# Altium PCB 核心板.pcbdoc (part 2 of 2)
Units mil, origin at the board's own origin, x right, y up, seen from the top; angles counter-clockwise.
Board outline 5980 x 3735 mil, 2 copper layers (Top Layer, Bottom Layer); 54 components, 185 nets, 550 pads, 371 vias.
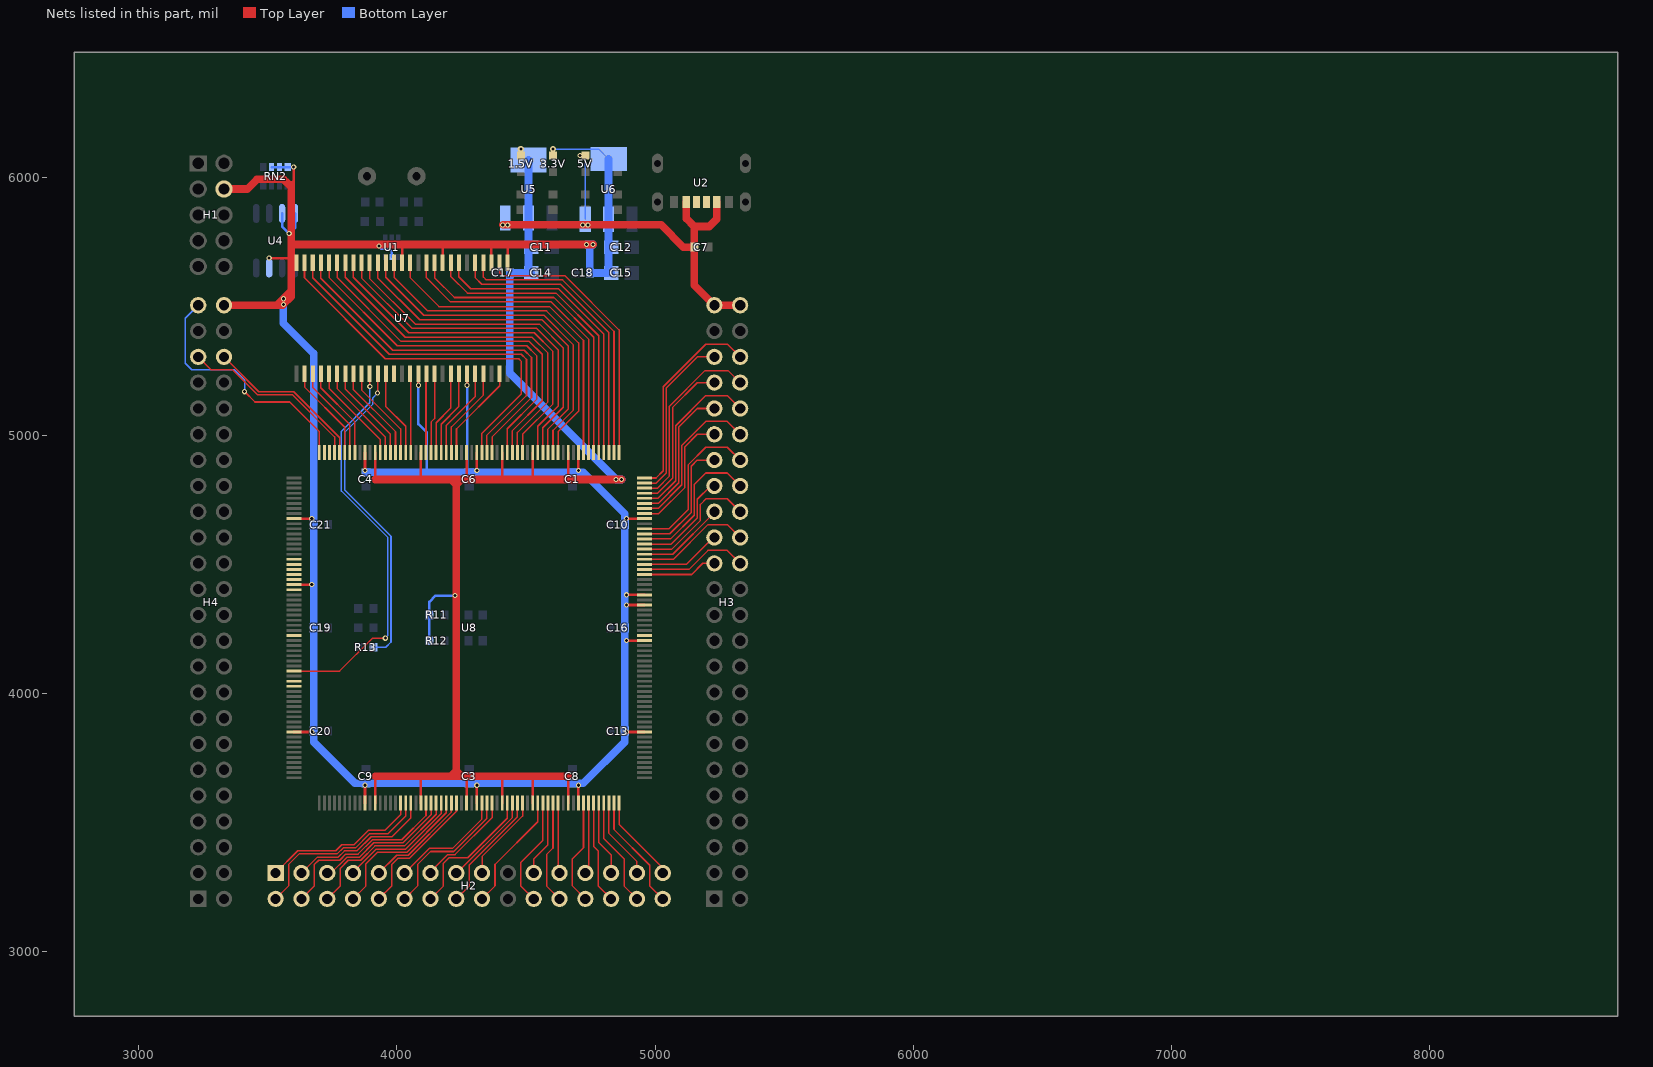
[diagram p2: the nets of this part, all layers, seen from the top]

## Via types
v1: diameter 20, hole 12, Top Layer to Bottom Layer, 369 vias
v2: diameter 24, hole 12, Top Layer to Bottom Layer, 2 vias

## Nets (pads, with @x,y where several pads share a name; then routed paths per layer and width w, separated by ;. In a path a pad name is that pad's centre, name@x,y a point inside that pad or via, vN(x,y) a via of type N, cw(c..) or ccw(c..) an arc to the next point about the centre after c; other vN are vias at no path point) (continued)
IO/161: H3.27 U8.161 | length 288.8
  Top Layer w6: U8.161@4959.14,4461.69 5142.05,4461.69 5185.36,4505 H3.27@5230,4505
IO/162: H3.28 U8.162 | length 422.1
  Top Layer w6: U8.162@4959.14,4481.38 5131.38,4481.38 5205,4555 5280,4555 H3.28@5330,4505
IO/163: H3.29 U8.163 | length 313.9
  Top Layer w6: U8.163@4959.14,4501.06 5121.92,4501.06 5225.86,4605 H3.29@5230,4605
IO/164: H3.30 U8.164 | length 447.2
  Top Layer w6: U8.164@4959.14,4520.75 5071.51,4520.75 5205.76,4655 5280,4655 H3.30@5330,4605
IO/165: H3.31 U8.165 | length 340.9
  Top Layer w6: U8.165@4959.14,4540.43 5068.57,4540.43 5230,4701.86 H3.31@5230,4705
IO/166: H3.32 U8.166 | length 509
  Top Layer w6: U8.166@4959.14,4560.12 5065.63,4560.12 5176,4670.49 5176,4733.17 5197.83,4755 5280,4755 H3.32@5330,4705
IO/167: H3.33 U8.167 | length 406.3
  Top Layer w6: U8.167@4959.14,4579.8 5062.68,4579.8 5164,4681.12 5164,4753.14 5215.86,4805 H3.33@5230,4805
IO/168: H3.34 U8.168 | length 566.7
  Top Layer w6: U8.168@4959.14,4599.49 5059.74,4599.49 5152,4691.75 5152,4810.03 5196.97,4855 5280,4855 H3.34@5330,4805
IO/169: H3.35 U8.169 | length 493.9
  Top Layer w6: U8.169@4959.14,4619.17 5056.8,4619.17 5140,4702.37 5140,4881.06 5163.94,4905 H3.35@5230,4905
IO/170: H3.36 U8.170 | length 623.9
  Top Layer w6: U8.170@4959.14,4638.86 5053.86,4638.86 5128,4713 5128,4886.03 5196.97,4955 5280,4955 H3.36@5330,4905
IO/173: H3.37 U8.173 | length 490.6
  Top Layer w6: U8.173@4959.14,4697.91 5014.88,4697.91 5116,4799.03 5116,4957.06 5163.94,5005 H3.37@5230,5005
IO/174: H3.38 U8.174 | length 621
  Top Layer w6: U8.174@4959.14,4717.6 5012.6,4717.6 5104,4809 5104,4962.03 5196.97,5055 5280,5055 H3.38@5330,5005
IO/175: H3.39 U8.175 | length 549.7
  Top Layer w6: U8.175@4959.14,4737.28 5012.28,4737.28 5092,4817 5092,5033.06 5163.94,5105 H3.39@5230,5105
IO/176: H3.40 U8.176 | length 681.2
  Top Layer w6: U8.176@4959.14,4756.97 5011.97,4756.97 5080,4825 5080,5038.03 5196.97,5155 5280,5155 H3.40@5330,5105
IO/177: H3.41 U8.177 | length 608.9
  Top Layer w6: U8.177@4959.14,4776.65 5009.68,4776.65 5068,4834.97 5068,5109.06 5163.94,5205 H3.41@5230,5205
IO/178: H3.42 U8.178 | length 737.9
  Top Layer w6: U8.178@4959.14,4796.34 5009.37,4796.34 5056,4842.97 5056,5114.03 5193.97,5252 5283,5252 H3.42@5330,5205
IO/179: H3.43 U8.179 | length 666.2
  Top Layer w6: U8.179@4959.14,4816.02 5005.05,4816.02 5044,4854.97 5044,5184.03 5164.97,5305 H3.43@5230,5305
IO/180: H3.44 U8.180 | length 796.2
  Top Layer w6: U8.180@4959.14,4835.71 5003.74,4835.71 5032,4863.97 5032,5189 5197,5354 5281,5354 H3.44@5330,5305
MA0: U7.23 U8.203 | length 1409.9
  Top Layer w6: U7.23@3736.95,5670 3736.95,5612.08 4001.03,5348 4502.91,5348 4541,5309.91 4541,5140.09 4427.64,5026.72 U8.203@4427.64,4934.13
MA1: U7.24 U8.206 | length 1435.6
  Top Layer w6: U7.24@3704.97,5670 3704.97,5610.03 3984,5331 4492.94,5331 4521.5,5302.44 4521.5,5147.56 4368.57,4994.63 U8.206@4368.57,4934.13
MA2: U7.25 U8.207 | length 1442.2
  Top Layer w6: U7.25@3673.95,5670 3673.95,5611.05 3970,5315 4481.97,5315 4502,5294.97 4502,5155.03 4348.9,5001.92 U8.207@4348.9,4934.13
MA3: U7.26 U8.208 | length 1450.4
  Top Layer w6: U7.26@3641.95,5670 3641.95,5611.08 3955.03,5298 4472,5298 4482.5,5287.5 4482.5,5162.5 4329.2,5009.2 U8.208@4329.2,4934.13
MA4: U7.29 U8.235 | length 370.4
  Top Layer w6: U7.29@3642,5240 3642,5188 3797.72,5032.28 U8.235@3797.72,4934.13
MA5: U7.30 U8.234 | length 365.3
  Top Layer w6: U7.30@3674,5240 3674,5186 3817.41,5042.6 U8.234@3817.41,4934.13
MA6: U7.31 U8.233 | length 360.6
  Top Layer w6: U7.31@3704.97,5240 3704.97,5185.03 3837.09,5052.91 U8.233@3837.09,4934.13
MA7: U7.32 U8.228 | length 388.1
  Top Layer w6: U7.32@3737,5240 3737,5183 3935.51,4984.48 U8.228@3935.51,4934.13
MA8: U7.33 U8.227 | length 383.4
  Top Layer w6: U7.33@3768,5240 3768,5182 3955.2,4994.81 U8.227@3955.2,4934.13
MA9: U7.34 U8.226 | length 378.3
  Top Layer w6: U7.34@3799.97,5240 3799.97,5180.03 3974.89,5005.11 U8.226@3974.89,4934.13
MA10: U7.22 U8.202 | length 1404.2
  Top Layer w6: U7.22@3768,5670 3768,5613 4016,5365 4512.88,5365 4563,5314.88 4563,5135.12 4447.31,5019.43 U8.202@4447.31,4934.13
MA11: U7.35 U8.225 | length 373.6
  Top Layer w6: U7.35@3831.05,5240 3831.05,5178.95 3994.57,5015.44 U8.225@3994.57,4934.13
MA12: U7.36 U8.224 | length 368.5
  Top Layer w6: U7.36@3863,5240 3863,5177 4014.26,5025.74 U8.224@4014.26,4934.13
MBA0: U7.20 U8.200 | length 1389.7
  Top Layer w6: U7.20@3831.05,5670 3831.05,5613.03 4046.08,5398 4532,5398 4604.5,5325.5 4604.5,5122.68 4486.69,5004.86 U8.200@4486.69,4934.13
MBA1: U7.21 U8.201 | length 1398
  Top Layer w6: U7.21@3799.97,5670 3799.97,5613.06 4032.03,5381 4523.85,5381 4585,5319.85 4585,5130.15 4467.01,5012.15 U8.201@4467.01,4934.13
MCAS: U7.17 U8.195 | length 1352.1
  Top Layer w6: U7.17@3926.05,5670 3926.05,5611 4088.05,5449 4561.91,5449 4664.37,5346.54 4664.37,5104.37 4585.11,5025.11 U8.195@4585.11,4934.13
MCKE: U7.37 U8.39 | length 1556.6
  Top Layer w6: U8.39@3600.86,4087.68 3777.68,4087.68 3905,4215 v1(3955,4215) ; U7.37@3894,5240 3895,5239 v1(3895,5190)
  Bottom Layer w6: v1(3895,5190) 3895,5126.97 3785,5016.97 3785,4785 3965,4605 3965,4225 v1(3955,4215)
MCLK: R13.2 U7.38 | length 1243.6
  Top Layer w6: v1(3925,5165) 3926.05,5166.05 U7.38@3926.05,5240
  Bottom Layer w6: R13.2@3909.66,4180 3956.87,4180 3977,4200.13 3977,4609.97 3797,4789.97 3797,5012 3907,5122 3907,5147 v1(3925,5165)
MCS: U7.19 U8.197 | length 1367.2
  Top Layer w6: U7.19@3863,5670 3863,5611 4059,5415 4541.97,5415 4625,5331.97 4625,5115 4545.74,5035.74 U8.197@4545.74,4934.13
MD0: U7.2 U8.181 | length 1068.7
  Top Layer w6: U7.2@4398,5670 4398,5631 4409,5620 4650,5620 4860.7,5409.3 U8.181@4860.7,4934.13
MD1: U7.4 U8.182 | length 1118.6
  Top Layer w6: U7.4@4334.97,5670 4334.97,5614 4345.97,5603 4641.47,5603 4841.02,5403.46 U8.182@4841.02,4934.13
MD2: U7.5 U8.183 | length 1129.2
  Top Layer w6: U7.5@4303,5670 4303,5612 4329,5586 4634,5586 4821.34,5398.66 U8.183@4821.34,4934.13
MD3: U7.7 U8.184 | length 1167.7
  Top Layer w6: U7.7@4239.97,5670 4239.97,5615 4285.97,5569 4626,5569 4801.65,5393.35 U8.184@4801.65,4934.13
MD4: U7.8 U8.185 | length 1174.6
  Top Layer w6: U7.8@4209,5670 4209,5616 4273,5552 4616.85,5552 4781.97,5386.89 U8.185@4781.97,4934.13
MD5: U7.10 U8.186 | length 1216.9
  Top Layer w6: U7.10@4146.05,5670 4146.05,5611.92 4222.97,5535 4608.32,5535 4762.27,5381.05 U8.186@4762.27,4934.13
MD6: U7.11 U8.187 | length 1224.9
  Top Layer w6: U7.11@4114,5670 4114,5612 4208,5518 4598.35,5518 4742.6,5373.76 U8.187@4742.6,4934.13
MD7: U7.13 U8.188 | length 1265.1
  Top Layer w6: U7.13@4051.05,5670 4051.05,5612 4163.05,5500 4591.35,5500 4722.9,5368.45 U8.188@4722.9,4934.13
MD8: U7.42 U8.222 | length 306.9
  Top Layer w6: U7.42@4051.05,5240 4053.62,5237.43 U8.222@4053.62,4934.13
MD9: U7.44 U8.219 | length 306.4
  Top Layer w6: U8.219@4112.68,4934.13 4112.68,5238.68 U7.44@4114,5240
MD10: U7.45 U8.218 | length 311.5
  Top Layer w6: U8.218@4132.36,4934.13 4132.36,5052.36 4146.05,5066.05 U7.45@4146.05,5240
MD11: U7.47 U8.217 | length 329.5
  Top Layer w6: U8.217@4152.05,4934.13 4152.05,5049.41 4209,5106.36 U7.47@4209,5240
MD12: U7.48 U8.216 | length 334.1
  Top Layer w6: U8.216@4171.73,4934.13 4171.73,5044.1 4239.97,5112.34 U7.48@4239.97,5240
MD13: U7.50 U8.215 | length 352.1
  Top Layer w6: U8.215@4191.41,4934.13 4191.41,5038.78 4303,5150.36 U7.50@4303,5240
MD14: U7.51 U8.214 | length 357.2
  Top Layer w6: U8.214@4211.1,4934.13 4211.1,5033.47 4334.97,5157.34 U7.51@4334.97,5240
MD15: U7.53 U8.213 | length 375.1
  Top Layer w6: U8.213@4230.78,4934.13 4230.78,5025.78 4398,5193 U7.53@4398,5240
MLDQ: U7.15 U8.193 | length 1334.5
  Top Layer w6: U7.15@3989,5670 3989,5613 4119,5483 4579.5,5483 4703.74,5358.76 4703.74,5094.37 4624.48,5015.11 U8.193@4624.48,4934.13
MRAS: U7.18 U8.196 | length 1361.4
  Top Layer w6: U7.18@3894,5670 3894,5609 4071,5432 4551.94,5432 4644.68,5339.26 4644.68,5110 4565.43,5030.74 U8.196@4565.43,4934.13
MUDQ: U7.39 U8.223 | length 337.7
  Top Layer w6: U7.39@3957,5240 3957,5113 4033.93,5036.06 U8.223@4033.93,4934.13
MWE: U7.16 U8.194 | length 1342.5
  Top Layer w6: U7.16@3957,5670 3957,5613 4104,5466 4569.38,5466 4684.05,5351.33 4684.05,5099.37 4604.8,5020.11 U8.194@4604.8,4934.13
PWRLED: H4.47 U8.240 | length 982.4
  Top Layer w6: v1(3410,5170) 3450,5130 3585,5130 3699.3,5015.7 U8.240@3699.3,4934.13
  Bottom Layer w6: H4.47@3230,5505 3180,5455 3180,5280 3205,5255 3370,5255 3410,5215 v1(3410,5170)
SL0: H2.22 U8.105 | length 427
  Top Layer w6: H2.22@4530,3205 4480,3255 4480,3346.06 4565.43,3431.48 U8.105@4565.43,3575.87
SL1: H2.21 U8.106 | length 293.7
  Top Layer w6: H2.21@4530,3305 4530,3359.09 4585.11,3414.2 U8.106@4585.11,3575.87
SL2: H2.24 U8.107 | length 401.9
  Top Layer w6: U8.107@4604.8,3575.87 4604.8,3401.91 4580,3377.12 4580,3255 H2.24@4630,3205
SL3: H2.23 U8.108 | length 273.2
  Top Layer w6: U8.108@4624.48,3575.87 4624.48,3310.51 H2.23@4630,3305
SL4: H2.26 U8.113 | length 409.4
  Top Layer w6: U8.113@4722.9,3575.87 4722.9,3402.91 4680,3360 4680,3255 H2.26@4730,3205
SL5: H2.25 U8.114 | length 276.1
  Top Layer w6: H2.25@4730,3305 4742.6,3317.59 U8.114@4742.6,3575.87
SR0: H2.28 U8.115 | length 398.9
  Top Layer w6: U8.115@4762.27,3575.87 4762.27,3407.72 4780,3390 4780,3255 H2.28@4830,3205
SR1: H2.27 U8.116 | length 290.8
  Top Layer w6: U8.116@4781.97,3575.87 4781.97,3423.03 4830,3375 H2.27@4830,3305
SR2: H2.30 U8.117 | length 424
  Top Layer w6: U8.117@4801.65,3575.87 4801.65,3438.36 4880,3360 4880,3255 H2.30@4930,3205
SR3: H2.29 U8.118 | length 315.9
  Top Layer w6: U8.118@4821.34,3575.87 4821.34,3458.66 4930,3350 H2.29@4930,3305
SR4: H2.32 U8.119 | length 449.2
  Top Layer w6: U8.119@4841.02,3575.87 4841.02,3473.99 4980,3335 4980,3255 H2.32@5030,3205
SR5: H2.31 U8.120 | length 341
  Top Layer w6: U8.120@4860.7,3575.87 4860.7,3494.3 5030,3325 H2.31@5030,3305
USBN1: H4.44 U8.236 | length 635.5
  Top Layer w6: H4.44@3330,5305 3465,5170 3600,5170 3778.03,4991.97 U8.236@3778.03,4934.13
USBP1: H4.43 U8.237 | length 717.4
  Top Layer w6: H4.43@3230,5305 3280,5255 3363.03,5255 3460.03,5158 3595.03,5158 3758.34,4994.68 U8.237@3758.34,4934.13
VB0: H2.1 U8.77 | length 622.7
  Top Layer w6: H2.1@3530,3305 3616,3391 3763.12,3391 3786.62,3414.5 3833.74,3414.5 3889.24,3470 3953.24,3470 4014.24,3531 U8.77@4014.24,3575.87
VB1: H2.2 U8.78 | length 735.5
  Top Layer w6: H2.2@3530,3205 3580,3255 3580,3338.03 3620.97,3379 3768.09,3379 3791.59,3402.5 3839.62,3402.5 3895.12,3458 3966.03,3458 4033.93,3525.91 U8.78@4033.93,3575.87
VB2: H2.3 U8.79 | length 569.4
  Top Layer w6: H2.3@3630,3305 3692,3367 3773.06,3367 3796.56,3390.5 3844.59,3390.5 3900.09,3446 3981,3446 4053.61,3518.61 U8.79@4053.61,3575.87
VB3: H2.4 U8.82 | length 713.2
  Top Layer w6: H2.4@3630,3205 3680,3255 3680,3338.03 3696.97,3355 3778.03,3355 3801.53,3378.5 3849.56,3378.5 3905.06,3434 4019,3434 4112.68,3527.68 U8.82@4112.68,3575.87
VB4: H2.5 U8.83 | length 541.2
  Top Layer w6: H2.5@3730,3305 3745,3305 3806.5,3366.5 3854.53,3366.5 3910.03,3422 4023.97,3422 4132.35,3530.38 U8.83@4132.35,3575.87
VB5: H2.6 U8.84 | length 640.6
  Top Layer w6: H2.6@3730,3205 3780,3255 3780,3323.03 3811.47,3354.5 3859.5,3354.5 3915,3410 4028.94,3410 4152.05,3533.1 U8.84@4152.05,3575.87
VCC5: 5V.2 C7.2 H3.47 H3.48 U2.A9 U2.B9 U5.3 U6.3 | length 1743.4
  Top Layer w30: v1(4410,5816.49) v1(4429.2,5816.49) v1(4719.94,5816.49) v1(4739.67,5816.49) 5023.51,5816.49 5110,5730 C7.2@5152.44,5730 ; U2.A9@5120.94,5905.19 5120.94,5841.49 5152.44,5810 ; U2.B9@5239.06,5905.19 5239.06,5839.06 5210,5810 5152.44,5810 ; H3.48@5330,5505 H3.47@5230,5505 5152.44,5582.56 C7.2@5152.44,5730 ; C7.2@5152.44,5730 5152.44,5810
  Bottom Layer w6: v1(4710,6085) 4729.45,6065.55 U6.3@4729.45,5838.07
VCC15: 1.5V.2 C11.2 C14.2 C17.2 R11.2 R12.2 U5.2 U5.4 U8.72 U8.81 U8.90 U8.97 U8.103 U8.110 U8.191 U8.198 U8.204 U8.211 U8.220 U8.229 | length 5951.2
  Top Layer w10: U8.72@3915.82,3575.87 3915.82,3680 ; 3915.82,4830 U8.229@3915.82,4934.13 ; U8.81@4092.99,3575.87 4092.99,3680 ; 4092.99,4830 U8.220@4092.99,4934.13 ; U8.90@4270.15,3575.87 4270.15,3680 ; 4270.15,4830 U8.211@4270.15,4934.13 ; U8.97@4407.94,3575.87 4407.94,3680 ; 4407.94,4830 U8.204@4407.94,4934.13 ; U8.103@4526.06,3575.87 4526.06,3680 ; 4526.06,4830 U8.198@4526.06,4934.13 ; U8.110@4663.85,3575.87 4663.85,3680 ; 4663.85,4830 U8.191@4663.85,4934.13
  Top Layer w30: 3915.82,3680 4092.99,3680 4209.52,3680 ; 3915.82,4830 4092.99,4830 4210.34,4830 ; 4663.85,3680 4526.06,3680 4407.94,3680 4270.15,3680 4250.48,3680 ; v1(4870,4830) v1(4849.07,4830) 4663.85,4830 4526.06,4830 4407.94,4830 4270.15,4830 4249.66,4830 ; 4209.52,3680 4230,3700.48 ; 4209.52,3680 4250.48,3680 ; 4210.34,4830 4230,4810.34 ; 4210.34,4830 4249.66,4830 ; 4230,3700.48 4230,4810.34 ; 4230,3700.48 4250.48,3680 ; 4230,4810.34 4249.66,4830
  Bottom Layer w10: R12.2@4125.34,4205 R11.2@4125.34,4305 4125.34,4355.34 4150,4380 v1(4225,4380)
  Bottom Layer w30: U5.4@4510,6067.5 U5.2@4510,5842.5 4510,5640.63 C14.2@4520.63,5630 C17.2@4437.56,5630 4437.56,5242.44 4850,4830 v1(4870,4830)
  other v2: 4480,6110
VCC33: 3.3V.2 C1.2 C3.2 C4.2 C6.2 C8.2 C9.2 C10.2 C12.2 C13.2 C15.2 C16.2 C18.2 C19.2 C20.2 C21.2 H1.4 H4.48 RN2.6 RN2.7 RN2.8 U1.5 U4.3 U4.7 U4.8 U6.2 U6.4 U7.1 U7.3 U7.9 U7.14 U7.27 U7.43 U7.49 U8.9 U8.22 U8.51 U8.70 U8.92 U8.112 U8.130 U8.148 U8.155 U8.157 U8.172 U8.189 U8.209 U8.231 | length 10841.6
  Top Layer w6: v2(4605,6110) 4605.2,6109.8 3.3V.2@4605.2,6084.5
  Top Layer w10: v1(3505,5687.5) 3589.18,5687.5 3590.13,5688.45 ; 3572.79,5980.63 3594.38,5980.63 3600,5986.25 ; 3590.13,5932.33 3600,5942.19 3600,5986.25 ; v1(3600,6040) 3600,5986.25 ; U8.51@3600.86,3851.46 v1(3670,3851.46) ; U8.22@3600.86,4422.32 v1(3670,4422.32) ; U8.9@3600.86,4678.23 v1(3670,4678.23) ; U8.70@3876.45,3575.87 v1(3876.45,3645.01) ; v1(3876.45,4864.99) U8.231@3876.45,4934.13 ; 4016.52,5740 4019.97,5736.55 U7.14@4019.97,5670 ; v1(4083,5195) U7.43@4083,5240 ; U7.9@4177,5670 4177,5738.85 4178.15,5740 ; v1(4272,5195) U7.49@4272,5240 ; U8.92@4309.52,3575.87 v1(4309.52,3645.01) ; v1(4309.52,4864.99) U8.209@4309.52,4934.13 ; 4362.26,5740 4366.05,5736.21 U7.3@4366.05,5670 ; U7.1@4429,5670 4429,5737.59 4431.41,5740 ; U8.112@4703.23,3575.87 v1(4703.23,3645.01) ; v1(4703.23,4864.99) U8.189@4703.23,4934.13 ; v1(4890,3851.46) U8.130@4959.14,3851.46 ; v1(4890,4205.79) U8.148@4959.14,4205.79 ; v1(4890,4343.58) U8.155@4959.14,4343.58 ; v1(4890,4382.95) U8.157@4959.14,4382.95 ; v1(4890,4678.23) U8.172@4959.14,4678.23
  Top Layer w30: H4.48@3330,5505 3535,5505 ; H1.4@3330,5955 3420,5955 3458.29,5993.29 3560.13,5993.29 3572.79,5980.63 3590.13,5963.29 3590.13,5932.33 3590.13,5740 ; v1(4760,5740) v1(4735,5740) 4431.41,5740 4362.26,5740 4178.15,5740 4016.52,5740 3590.13,5740 ; 3535,5505 v1(3560,5530) 3590.13,5560.13 ; 3535,5505 3556.86,5505 v1(3560,5508.14) 3590.13,5538.27 3590.13,5560.13 ; 3590.13,5560.13 3590.13,5688.45 3590.13,5740
  Bottom Layer w6: v2(4605,6110) 4781.93,6110 U6.4@4820,6071.93 ; C15.2@4818.57,5630 C15.2@4830.63,5630
  Bottom Layer w10: RN2.6@3514.25,6040.44 RN2.7@3545.75,6040.44 RN2.8@3577.24,6040.44 3577.68,6040 v1(3600,6040) ; U4.7@3555,5860.61 3555,5810 v1(3582.5,5782.5) 3605,5805 U4.8@3605,5860.61 ; v1(3930,5735) 3940,5725 3967.5,5725 3980,5712.5 U1.5@3980,5692.6 ; v1(4083,5195) 4083,5045 4115.83,5012.17 4115.83,4862.56 4110.83,4857.56 ; v1(4272,5195) 4272,4865.56 C6.2@4280,4857.56
  Bottom Layer w30: v1(3560,5530) v1(3560,5508.14) 3560,5435 3677.44,5317.56 C21.2@3677.44,4655 C19.2@3677.44,4255 C20.2@3677.44,3855 3677.44,3812.57 3837.57,3652.44 C9.2@3880,3652.44 C3.2@4280,3652.44 C8.2@4680,3652.44 4722.43,3652.44 4882.56,3812.57 C13.2@4882.56,3855 C16.2@4882.56,4255 C10.2@4882.56,4655 4882.56,4697.43 4722.43,4857.56 C1.2@4680,4857.56 C6.2@4280,4857.56 4110.83,4857.56 C4.2@3880,4857.56 ; C15.2@4818.57,5630 C18.2@4747.56,5630 4747.56,5727.44 ; U6.4@4820,6071.93 U6.2@4820,5838.07 4820,5640.63 C15.2@4830.63,5630 ; 4747.56,5727.44 v1(4735,5740) v1(4760,5740) 4747.56,5727.56 4747.56,5727.44
VG0: H2.7 U8.85 | length 479.2
  Top Layer w6: H2.7@3830,3305 3830,3308.03 3919.97,3398 4033.91,3398 4171.73,3535.81 U8.85@4171.73,3575.87
VG1: H2.8 U8.86 | length 587.3
  Top Layer w6: H2.8@3830,3205 3880,3255 3880,3341.06 3924.94,3386 4038.88,3386 4191.41,3538.53 U8.86@4191.41,3575.87
VG2: H2.9 U8.87 | length 413.6
  Top Layer w6: H2.9@3930,3305 3999,3374 4043.85,3374 4211.1,3541.24 U8.87@4211.1,3575.87
VG3: H2.10 U8.88 | length 521.7
  Top Layer w6: H2.10@3930,3205 3980,3255 3980,3338.03 4003.97,3362 4048.82,3362 4230.78,3543.96 U8.88@4230.78,3575.87
VG4: H2.11 U8.93 | length 447.5
  Top Layer w6: H2.11@4030,3305 4125.5,3400.5 4215.5,3400.5 4329.2,3514.2 U8.93@4329.2,3575.87
VG5: H2.12 U8.94 | length 555.7
  Top Layer w6: H2.12@4030,3205 4080,3255 4080,3338.03 4130.47,3388.5 4220.47,3388.5 4348.9,3516.92 U8.94@4348.9,3575.87
VR0: H2.13 U8.95 | length 386.6
  Top Layer w6: H2.13@4130,3305 4130,3310 4196.5,3376.5 4225.44,3376.5 4368.57,3519.63 U8.95@4368.57,3575.87
VR1: H2.14 U8.98 | length 536.9
  Top Layer w6: H2.14@4130,3205 4180,3255 4180,3343.03 4201.47,3364.5 4274.5,3364.5 4427.64,3517.64 U8.98@4427.64,3575.87
VR2: H2.15 U8.99 | length 362
  Top Layer w6: H2.15@4230,3305 4231.97,3305 4447.31,3520.34 U8.99@4447.31,3575.87
VR3: H2.16 U8.100 | length 469
  Top Layer w6: H2.16@4230,3205 4280,3255 4280,3336.06 4467.01,3523.06 U8.100@4467.01,3575.87
VR4: H2.17 U8.101 | length 335.8
  Top Layer w6: H2.17@4330,3305 4330,3369.09 4486.69,3525.77 U8.101@4486.69,3575.87
VR5: H2.18 U8.104 | length 460.2
  Top Layer w6: H2.18@4330,3205 4380,3255 4380,3338.03 4545.74,3503.77 U8.104@4545.74,3575.87
"": U2.A5 U2.B5 U7.40 U8.17 U8.18 U8.19 U8.20 U8.21 U8.23 U8.32 U8.41 U8.42 U8.149 U8.238 U8.239

## Polygon pours and split planes (outlines as drawn)
GND on Top Layer (solid, remove dead copper, pour order 0): 3060,3000 5485,3000 5485,6235 3060,6235
GND on Bottom Layer (solid, remove dead copper, pour order 1): 3000,3055 5590,3055 5590,6200 3000,6200

## Keep-outs
Board Outline Layer:
  lines w10 net "": 3130,3155 ccw(c3180,3155) 3180,3105 5380,3105 ccw(c5380,3155) 5430,3155 5430,6105 ccw(c5380,6105) 5380,6155 3180,6155 ccw(c3180,6105) 3130,6105 3130,3155

## Other copper
Top Layer:
  drawing of 427 lines, arcs and shapes, not listed
Bottom Layer:
  region net VCC15: 4130.34,4337.01 4120.34,4337.01 4109.46,4322.01 4141.22,4322.01
  region net VCC15: 4120.34,4272.99 4130.34,4272.99 4141.22,4287.99 4109.46,4287.99
  region net $1N12195: 4209.54,4308 4200.54,4315.5 4200.54,4294.5 4209.54,4302
  region net $1N12195: 4182,4278.99 4188,4278.99 4195.5,4287.99 4174.5,4287.99
  region net VCC15: 4120.34,4237.01 4109.46,4222.01 4141.22,4222.01 4130.34,4237.01
  region net $1N379: 4209.54,4202 4209.54,4208 4200.54,4215.5 4200.54,4194.5
  region net $1N2047: 4055.97,5975.81 4081.66,5944.31 4087.66,5945.81 4107.53,5988.71
  region net $1N16805: 3852.47,5988.71 3872.34,5945.81 3878.34,5944.31 3904.03,5975.81
  region net PWRLED: 3198.57,5506.97 3190.02,5469.26 3194.26,5465.02 3231.97,5473.57
  region net $1N12195: 4252.7,4308 4252.7,4302 4261.7,4294.5 4261.7,4315.5
  region net VCC33: 4617.28,3637.44 4662.28,3636.69 4662.28,3668.19 4617.28,3667.44
  region net VCC33: 4722.43,3637.44 4722.43,3667.44 4697.72,3668.19 4697.72,3636.69
  region net VCC15: 4495,5658.43 4525,5658.43 4548.39,5703.43 4492.87,5703.43
  region net VCC15: 4495,5801.57 4492.87,5703.43 4548.39,5703.43 4525,5801.57
  region net VCC15: 4447.87,5645 4447.87,5615 4492.87,5603.43 4492.87,5656.57
  region net VCC15: 4495,5701.57 4492.87,5656.57 4548.39,5656.57 4525,5701.57
  region net $1N734: 3906.66,4356.01 3899.16,4347.01 3920.16,4347.01 3912.66,4356.01
  region net $1N734: 3906.66,4303.99 3912.66,4303.99 3920.16,4312.99 3899.16,4312.99
  region net $1N16805: 3872.34,5878.28 3878.34,5878.28 3885.84,5887.28 3864.84,5887.28
  region net $1N16805: 3872.34,5931.72 3864.84,5922.72 3885.84,5922.72 3878.34,5931.72
  region net AS_DO: 3227.9,5621.6 3268.11,5612.65 3272.35,5616.89 3263.4,5657.1
  region net C_CONF: 3227.9,5821.6 3268.11,5812.65 3272.35,5816.89 3263.4,5857.1
  region net C_DONE: 3263.4,5952.9 3272.35,5993.11 3268.11,5997.35 3227.9,5988.4
  region net VCC33: 3662.44,3812.57 3692.44,3812.57 3693.19,3837.28 3661.69,3837.28
  region net VCC33: 3662.44,3917.72 3661.69,3872.72 3693.19,3872.72 3692.44,3917.72
  region net VCC33: 3837.57,3637.44 3862.28,3636.69 3862.28,3668.19 3837.57,3667.44
  region net VCC33: 3942.72,3637.44 3942.72,3667.44 3897.72,3668.19 3897.72,3636.69
  region net VCC33: 4897.56,4592.28 4898.31,4637.28 4866.81,4637.28 4867.56,4592.28
  region net VCC33: 4897.56,4697.43 4867.56,4697.43 4866.81,4672.72 4898.31,4672.72
  region net VCC33: 4805,5701.57 4802.87,5656.57 4858.39,5656.57 4835,5701.57
  region net VCC33: 4757.87,5645 4757.87,5615 4802.87,5603.43 4802.87,5656.57
  region net VCC33: 4897.56,3812.57 4898.31,3837.28 4866.81,3837.28 4867.56,3812.57
  region net VCC33: 4897.56,3917.72 4867.56,3917.72 4866.81,3872.72 4898.31,3872.72
  region net VCC33: 4897.56,4317.72 4867.56,4317.72 4866.81,4272.72 4898.31,4272.72
  region net VCC33: 4897.56,4192.28 4898.31,4237.28 4866.81,4237.28 4867.56,4192.28
  region net VCC33: 4805,5658.43 4835,5658.43 4858.39,5703.43 4802.87,5703.43
  region net VCC33: 4805,5801.57 4802.87,5703.43 4858.39,5703.43 4835,5801.57
  region net VCC33: 4805,5932.29 4798.35,5887.29 4841.65,5887.29 4835,5932.29
  region net VCC33: 4805,5743.86 4835,5743.86 4841.65,5788.86 4798.35,5788.86
  region net VCC5: 4726.45,5896.29 4718.95,5887.29 4739.95,5887.29 4732.45,5896.29
  region net VCC33: 4805,5980.86 4835,5980.86 4872.5,6025.86 4767.5,6025.86
  region net VCC33: 4740.13,6113 4740.13,6107 4749.13,6099.5 4749.13,6117.99
  region net VCC15: 4495,5936.02 4489.33,5891.02 4530.67,5891.02 4525,5936.02
  region net VCC15: 4495,5748.98 4525,5748.98 4530.67,5793.98 4489.33,5793.98
  region net VCC15: 4495,5973.98 4525,5973.98 4562.5,6018.98 4457.5,6018.98
  region net VCC33: 4617.28,4872.56 4617.28,4842.56 4662.28,4841.81 4662.28,4873.31
  region net VCC33: 4722.43,4872.56 4697.72,4873.31 4697.72,4841.81 4722.43,4842.56
  region net $1N379: 4252.7,4202 4261.7,4194.5 4261.7,4215.5 4252.7,4208
  region net $1N379: 4280.5,4231.72 4274.5,4231.72 4267,4222.72 4288,4222.72
  region net VCC33: 4217.28,3637.44 4262.28,3636.69 4262.28,3668.19 4217.28,3667.44
  region net VCC33: 4342.72,3637.44 4342.72,3667.44 4297.72,3668.19 4297.72,3636.69
  region net VCC33: 4217.28,4842.56 4262.28,4841.81 4262.28,4873.31 4217.28,4872.56
  region net VCC33: 4277,4888.31 4267,4888.31 4262.28,4873.31 4289.5,4873.31
  region net VCC33: 4342.72,4872.56 4297.72,4873.31 4297.72,4841.81 4342.72,4842.56
  region net VCC33: 4732.56,5692.72 4731.81,5647.72 4763.31,5647.72 4762.56,5692.72
  region net VCC33: 4808.31,5645 4763.31,5647.72 4763.31,5612.28 4808.31,5615
  region net VCC33: 3692.44,4717.72 3662.44,4717.72 3661.69,4672.72 3693.19,4672.72
  region net VCC33: 3662.44,4592.28 3692.44,4592.28 3693.19,4637.28 3661.69,4637.28
  region net VCC33: 3942.72,4842.56 3942.72,4872.56 3897.72,4873.31 3897.72,4841.81
  region net MCLK: 3934.54,4177 3934.54,4183 3925.54,4190.5 3925.54,4169.5
  region net $1N734: 3906.66,4281.01 3899.16,4272.01 3920.16,4272.01 3912.66,4281.01
  region net VCC33: 3662.44,4317.72 3661.69,4272.72 3693.19,4272.72 3692.44,4317.72
  region net VCC33: 3662.44,4192.28 3692.44,4192.28 3693.19,4237.28 3661.69,4237.28
  region net $1N734: 3939.78,5677.21 3945.48,5674.43 3962.68,5680.79 3946.14,5694.18
  region net VCC33: 3985,5712.5 3975,5712.5 3971.73,5704.41 3988.27,5704.41
  region net $1N16804: 4008.59,5709.41 4002.59,5709.41 3997.32,5704.41 4013.86,5704.41
  region net $1N2047: 4019.52,5785.57 4002.55,5779.21 4013.86,5760.82 4020.22,5777.79
  region net $1N16804: 3943.33,5785.57 3939.78,5780.64 3946.14,5763.67 3960.3,5779.21
  region net $1N16804: 3957.41,5751 3962.68,5755.59 3946.14,5755.59 3951.41,5751
  region net $1N16804: 3937.66,5803.99 3945.16,5812.99 3924.16,5812.99 3931.66,5803.99
  region net $1N16804: 3959.54,5833 3950.54,5840.5 3950.54,5819.5 3959.54,5827
  region net $1N16805: 3872.34,5856.01 3864.84,5847.01 3885.84,5847.01 3878.34,5856.01
  region net VCC15: 4498.31,5645 4453.31,5647.72 4453.31,5612.28 4498.31,5615
  region net VCC15: 4422.56,5567.28 4452.56,5567.28 4453.31,5612.28 4421.81,5612.28
  region net AS_CS: 3588.84,5611.11 3593.6,5607.38 3611.1,5614.28 3592.6,5625.48
  region net AS_CS: 3608,5694.73 3602,5694.73 3594.5,5680.3 3615.5,5680.3
  region net AS_DI: 3552,5604.05 3558,5604.05 3565.5,5618.48 3544.5,5618.48
  region net AS_DI: 3558,5694.73 3552,5694.73 3544.5,5680.3 3565.5,5680.3
  region net VCC33: 3600,5809.95 3610,5809.95 3617.4,5836.3 3592.6,5836.3
  region net VCC33: 3550,5810 3560,5810 3567.4,5836.3 3542.6,5836.3
  region net AS_CK: 3508,5815.27 3517.4,5836.3 3492.6,5836.3 3502,5815.27
  region net AS_DO: 3458,5815.27 3465.5,5829.7 3444.5,5829.7 3452,5815.27
  region net C_CE: 3479.5,5944.82 3485.5,5944.82 3493,5953.82 3472,5953.82
  region net VCC33: 3539.09,6045.44 3524.09,6056.18 3524.09,6024.69 3539.09,6035.44
  region net C_STAT: 3511.25,5944.82 3517.25,5944.82 3524.09,5953.82 3504.41,5953.82
  region net VCC33: 3570.59,6045.44 3555.59,6056.18 3555.59,6024.69 3570.59,6035.44
  region net VCC33: 3520.91,6045.44 3520.91,6035.44 3535.91,6024.69 3535.91,6056.18
  region net C_CONF: 3542.75,5944.82 3548.75,5944.82 3555.59,5953.82 3535.91,5953.82
  region net VCC33: 3549.44,6045.44 3549.44,6035.44 3564.44,6024.69 3564.44,6056.18
  region net VCC33: 3600,6035 3600,6045 3590.04,6056.18 3590.04,6024.69
  region net C_DONE: 3574.24,5994.31 3566.74,5985.31 3587.74,5985.31 3580.24,5994.31
  region net C_DONE: 3580.24,5944.82 3587.74,5953.82 3566.74,5953.82 3574.24,5944.82
  region net $1N2047: 4081.66,5878.28 4087.66,5878.28 4095.16,5887.28 4074.16,5887.28
  region net $1N2047: 4081.66,5931.72 4074.16,5922.72 4095.16,5922.72 4087.66,5931.72
  region net $1N16804: 4000.46,5833 4000.46,5827 4009.46,5819.5 4009.46,5840.5
  region net $1N2047: 4062.42,5812 4065.53,5806.63 4082.5,5812.99 4068.78,5828.97
  region net $1N2047: 4081.66,5856.01 4074.16,5847.01 4095.16,5847.01 4087.66,5856.01
  region net C_CE: 3490,5921.61 3485.5,5932 3479.5,5932 3475,5921.61
  region net C_CONF: 3552.97,5946.03 3548.75,5956.77 3542.75,5957.22 3538.02,5947.16
  region net VCC33: 3593.39,6047.5 3583,6045 3583,6035 3593.39,6032.5
  region net VCC5: 4709.37,6075.02 4719.9,6070.86 4724.14,6075.1 4719.98,6085.63
  region net VCC33: 4612.94,6101 4625.4,6107 4625.4,6113 4612.94,6119
  region net C_DONE: 4767.52,4145.63 4765.38,4137.12 4769.62,4132.88 4778.13,4135.02
  region net C_STAT: 4825.02,4170.63 4820.86,4160.1 4825.1,4155.86 4835.63,4160.02
  region net VCC33: 3929.37,5725.02 3936.46,5721.46 3943.54,5728.54 3939.98,5735.63
  region net C_CONF: 3527.5,4311.61 3523,4318.03 3517,4318.03 3512.5,4311.61
  region net AS_CK: 3549.98,4154.37 3554.14,4164.9 3549.9,4169.14 3539.37,4164.98
  region net AS_DO: 3540.63,4134.98 3530.1,4139.14 3525.86,4134.9 3530.02,4124.37
  region net C_CE: 3547.5,4211.61 3543,4222 3537,4222 3532.5,4211.61
  region net AS_CS: 3525.63,4404.98 3515.1,4409.14 3510.86,4404.9 3515.02,4394.37
  region net AS_DI: 3533.39,4372.5 3523.94,4368 3523.94,4362 3533.39,4357.5
  region net VCC33: 4264.5,5188.39 4267,5178 4277,5178 4279.5,5188.39
  region net VCC33: 3583.13,5792.48 3574.01,5798.06 3566.94,5790.99 3572.52,5781.87
  region net VCC33: 3592.48,5781.87 3598.06,5790.99 3590.99,5798.06 3581.87,5792.48
  region net MCKE: 3964.98,4214.37 3967.12,4222.88 3962.88,4227.12 3954.37,4224.98
  region net $1N12195: 4192.5,4261.61 4188,4272 4182,4272 4177.5,4261.61
  region net $1N379: 4270,4248.39 4274.5,4238 4280.5,4238 4285,4248.39
  region net MCKE: 3887.5,5183.39 3892,5173 3898,5173 3902.5,5183.39
  region net VCC33: 4075.5,5188.39 4078,5178 4088,5178 4090.5,5188.39
  region net MCLK: 3915.02,5165.63 3910.86,5155.1 3915.1,5150.86 3925.63,5155.02
  region net PWRLED: 3417.5,5176.61 3413,5187 3407,5187 3402.5,5176.61
  region net AS_DO: 3430,5724.8 3433.93,5735.29 3429.5,5739.35 3418.94,5734.94
  region net AS_DI: 3534.37,5730.02 3544.9,5725.86 3549.14,5730.1 3544.98,5740.63
  region net AS_CS: 3534.37,5760.02 3544.9,5755.86 3549.14,5760.1 3544.98,5770.63
  region net AS_CK: 3497.5,5818.39 3502,5808 3508,5808 3512.5,5818.39
  region net AS_CK: 3512.5,5831.61 3508,5842 3502,5842 3497.5,5831.61
  region net VCC15: 4218.39,4387.5 4208,4385 4208,4375 4218.39,4372.5

## Silkscreen, mask and mechanical layers (free items; w line width, h text height)
Top Silkscreen Layer:
  text "5V-IN" at 4784.56,6109.54 h57.27 r270
  text "1.5V" at 4409.52,6109.34 h57.45 r270
  text "3.3V" at 4534.52,6109.34 h57.45 r270
  text "5V" at 4659.52,6108.46 h57.45 r270
  text "JLCJLCJLCJLC" at 5055.18,5976.99 h20.44
  text "uMSX Rev. 4.5 - Core Board v0.1" at 5097.48,4967.2 h51.1 r270
  text "Denjhang 2023.7.8" at 5022.48,4935.78 h51.1 r270
  text "Thanks to the original author of umsx" at 4703.11,4905.5 h38.33 r270
  text "www.va-de-retro.com" at 4593.11,4875.2 h38.33 r270
  text "2018 BCH @VDR" at 4642.31,4865.1 h38.33 r270